# Altium PCB Led_chaser2.PcbDoc
Units mm, origin at the board's own origin, x right, y up, seen from the top; angles counter-clockwise.
Board outline 78.74 x 76.2 mm, 2 copper layers (Top Layer, Bottom Layer), stack 1.1 mm thick; 19 components, 17 nets, 59 pads, 5 vias.
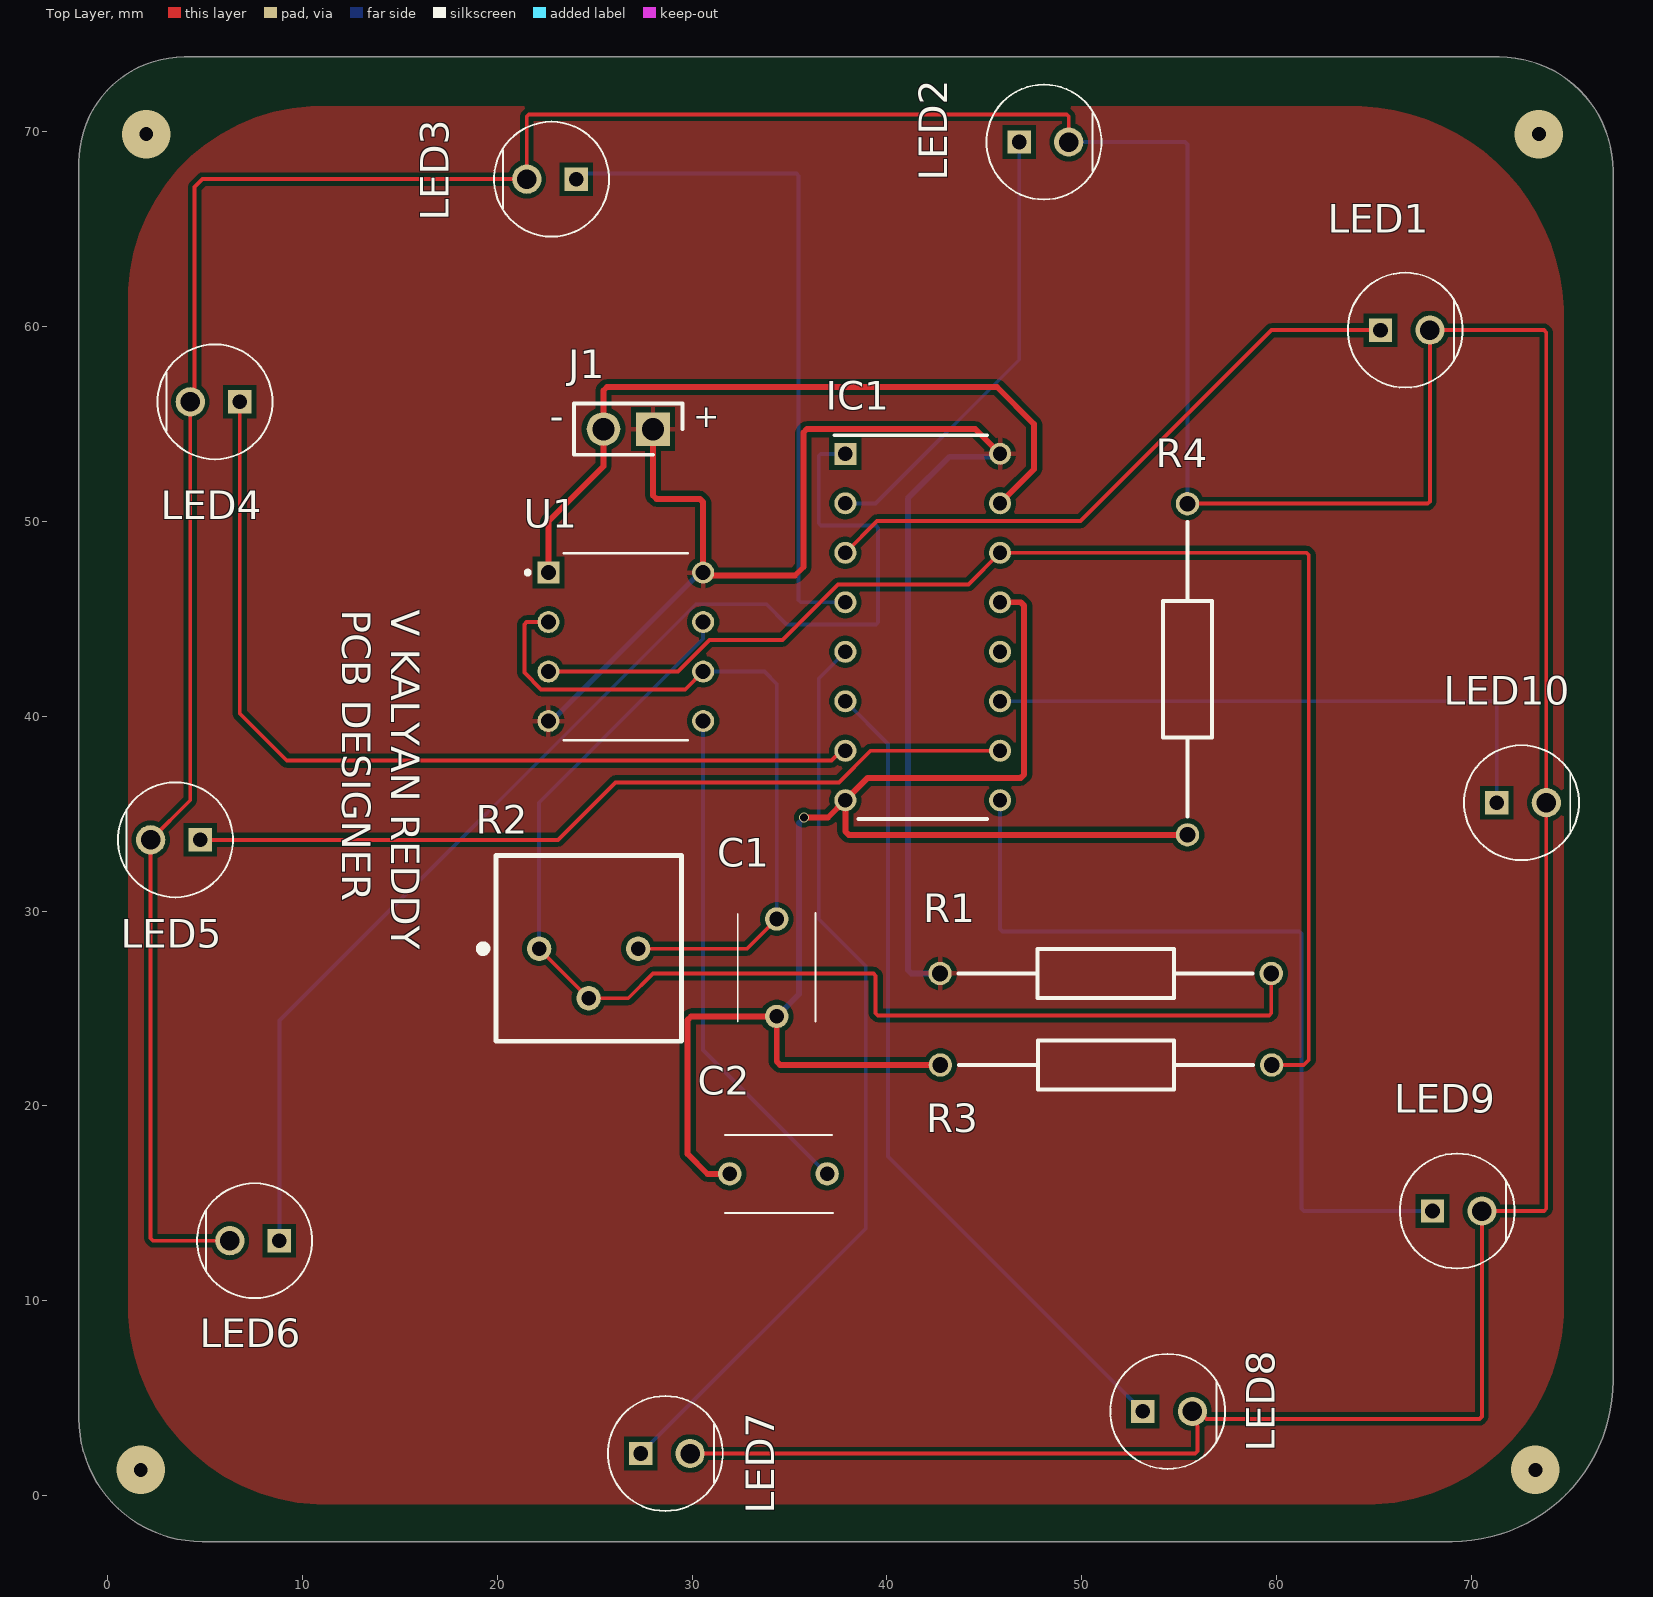
[diagram p0: Top Layer view]
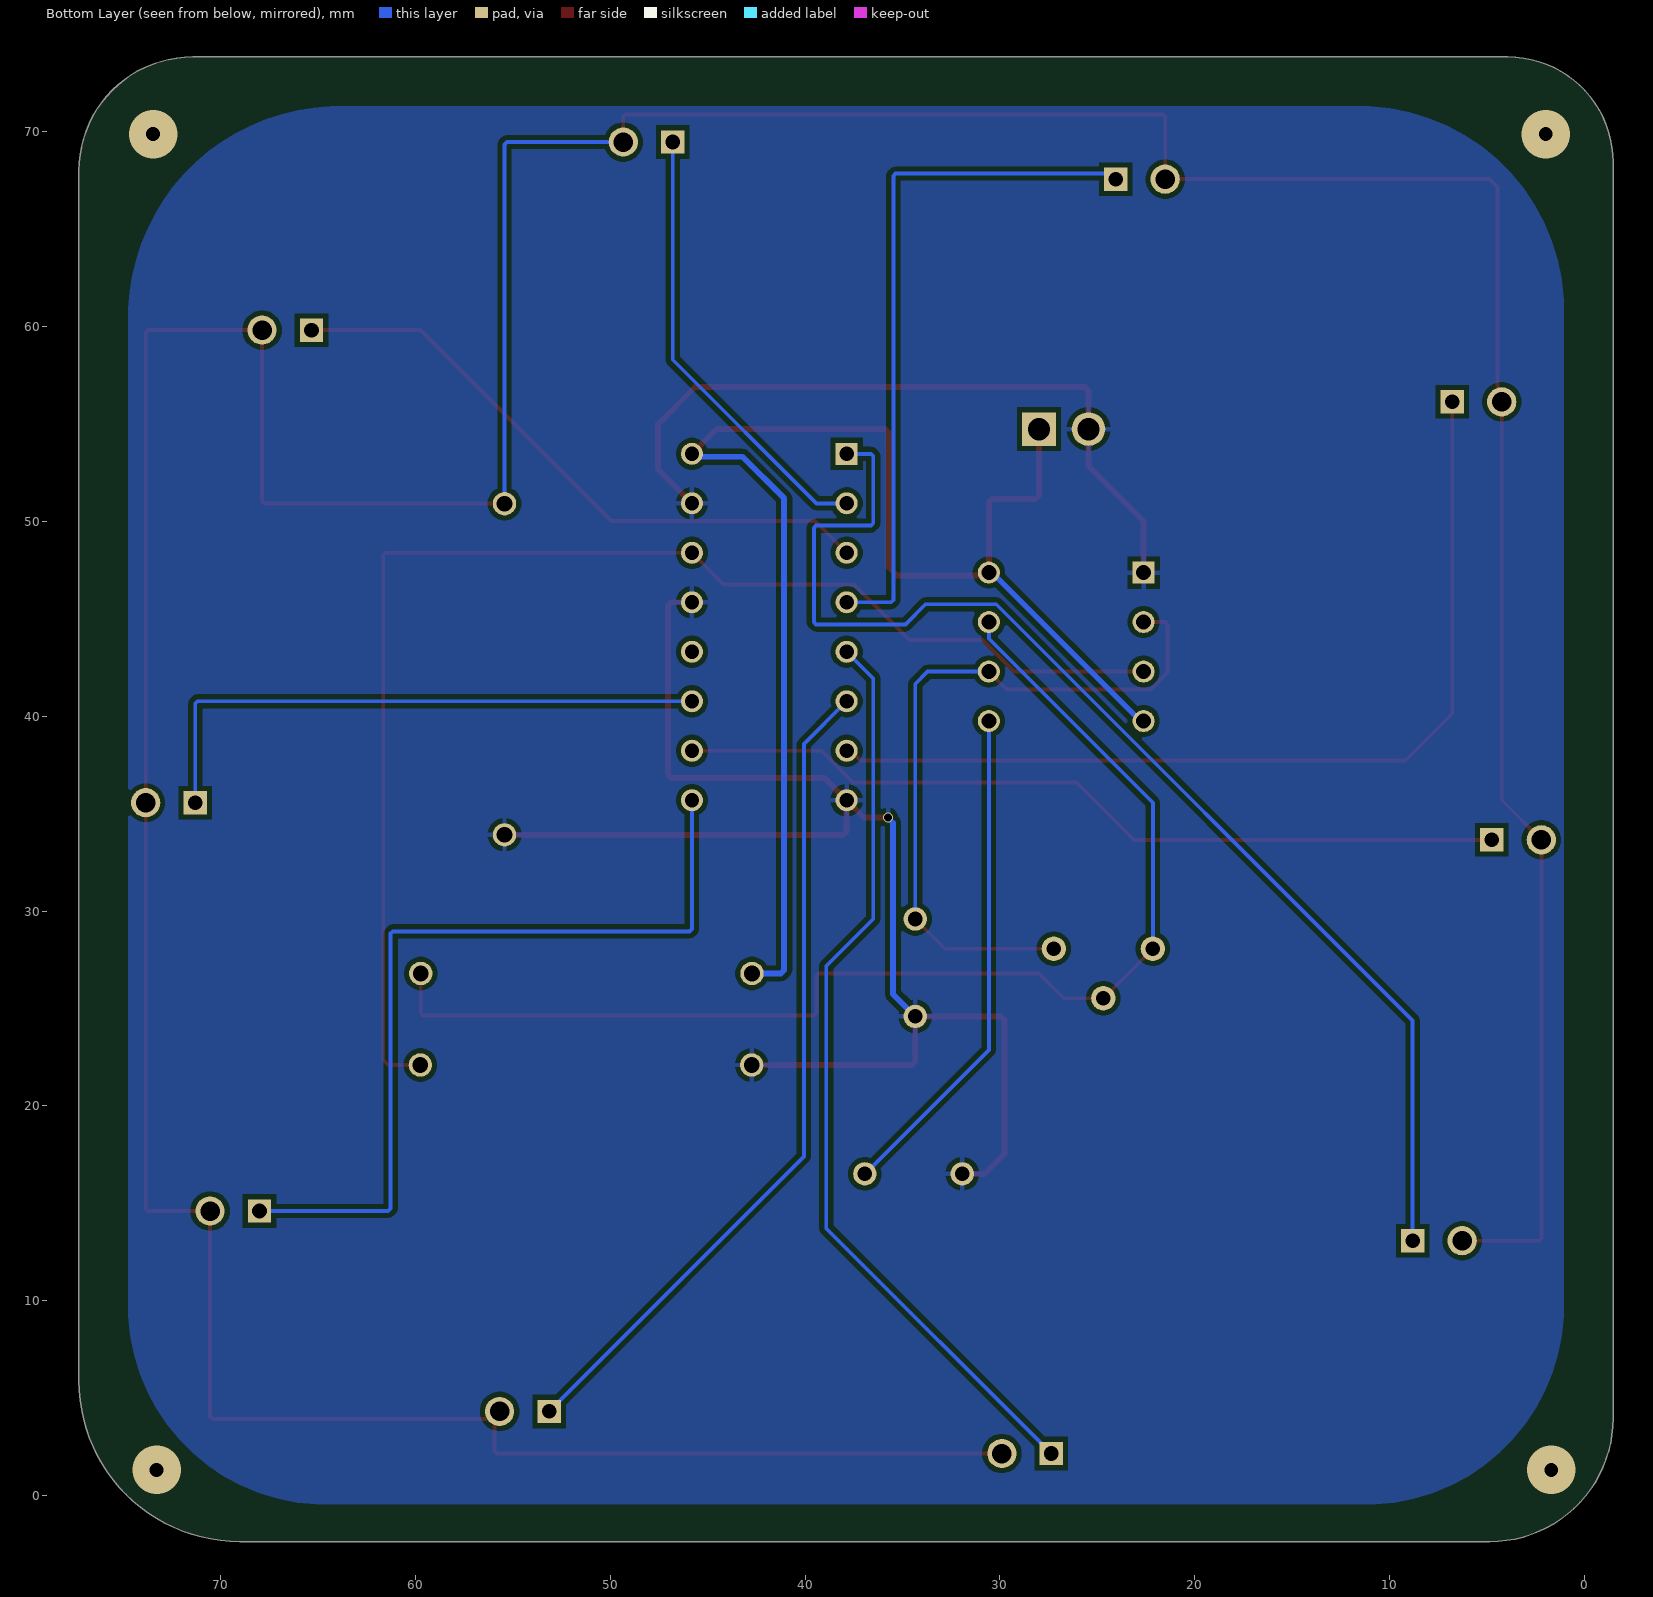
[diagram p1: Bottom Layer view, seen from below]
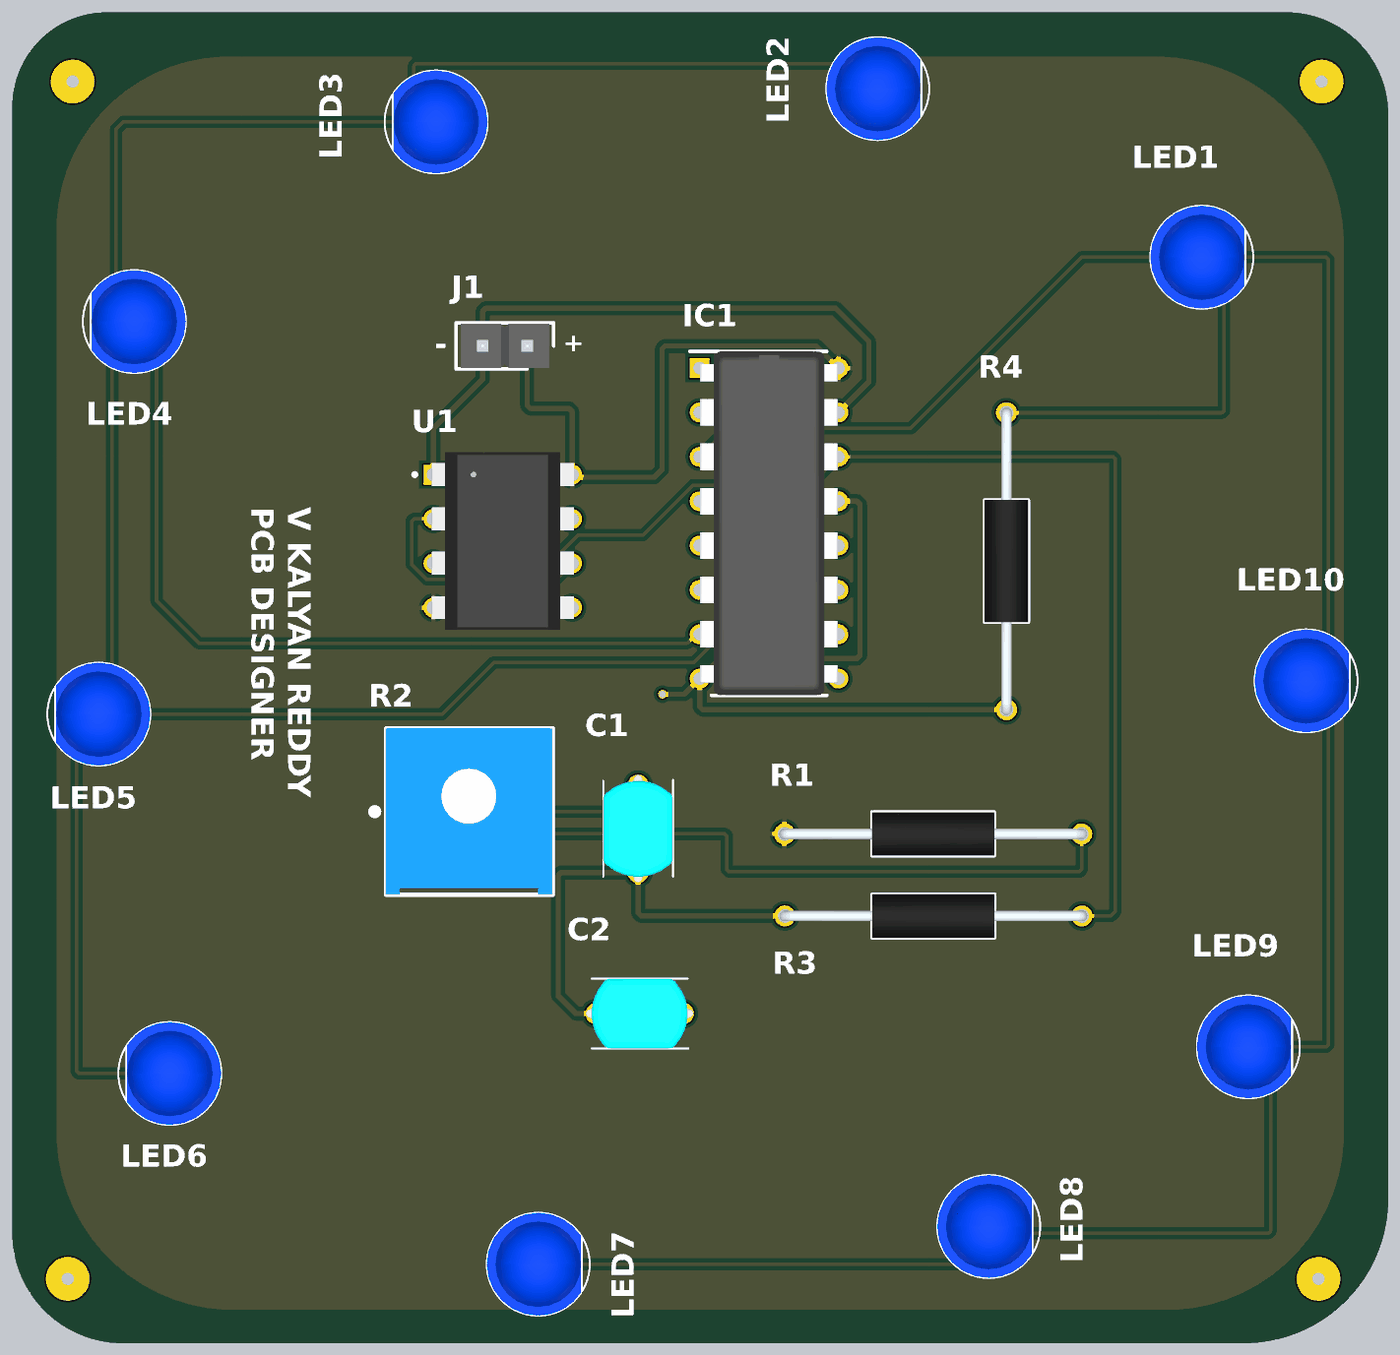
[diagram p2: 3D render of the assembled board from above, using the file's embedded part models]

## Layer stack, top to bottom
Top Solder: solder mask 0.05, SM-001, Dk 4
Top Layer: signal copper 0.1
Dielectric 1: dielectric 0.9, FR-4, Dk 4.8
Bottom Layer: signal copper 0.1
Bottom Solder: solder mask 0.05, SM-001, Dk 4

## Board outline
4.851,-2.362 69.012,-2.362 ccw(c69.012,5.893) 77.267,5.893 77.267,67.996 ccw(c71.425,67.996) 71.425,73.838 3.937,73.838 ccw(c3.937,68.428) -1.473,68.428 -1.473,3.962 ccw(c4.851,3.962)

## Design rules (kind name [scope] priority, off if disabled: settings)
Clearance [All] p1: gap=0.25 ignorepadtopadclearanceinfootprint=FALSE
PolygonConnect [All] p1: connectstyle=Relief reliefconductorwidth=0.254 reliefentries=4 polygonreliefangle="90 Angle" airgapwidth=0.254
RoutingVias [All] p1: holewidth=0.4 width=0.5 viastyle="Through Hole" minholewidth=0.4 minwidth=0.5 maxholewidth=0.4 maxwidth=0.5
SilkToSilkClearance [All] p1: silktosilkclearance=0.25
SilkToSolderMaskClearance [IsPad] p1: minsilkscreentomaskgap=0.25 clearancetoexposedcopper=TRUE
SolderMaskExpansion [All] p1: expansion=0.102 istentingtop=FALSE
Width WidthPow [(InNet('VCC') OR InNet('GND'))] p1: maxlimit=0.3 minlimit=0.2 preferedwidth=0.3
Width [All] p2: maxlimit=0.5 minlimit=0.1 preferedwidth=0.2
28 further rules are at their usual default settings.

## Components (designator, comment, footprint, x,y, rotation, side; value= is the part's Value field where it differs from the comment)
C1 "22uf" RCEC71H226MWK1H03B 34.341,24.591 r90 top
C2 "10nf" RCEC71H226MWK1H03B 31.928,16.51 r0 top
IC1 "CD74HC4017E" DIP794W53P254L1930H508Q16N 41.834,44.577 r0 top (schematic designator IC?)
J1 "M20-9990246" HDRV2W66P0X254_1X2_508X254X874P 27.991,54.737 r180 top
LED1 "151051BS04000" 151051BS04000 65.329,59.817 r0 top
LED2 "151051BS04000" 151051BS04000 46.787,69.469 r0 top
LED3 "151051BS04000" 151051BS04000 24.054,67.564 r180 top
LED4 "151051BS04000" 151051BS04000 6.782,56.134 r180 top
LED5 "151051BS04000" 151051BS04000 4.75,33.655 r180 top
LED6 "151051BS04000" 151051BS04000 8.814,13.081 r180 top
LED7 "151051BS04000" 151051BS04000 27.356,2.159 r0 top
LED8 "151051BS04000" 151051BS04000 53.137,4.318 r0 top
LED9 "151051BS04000" 151051BS04000 67.996,14.605 r0 top
LED10 "151051BS04000" 151051BS04000 71.298,35.56 r0 top
R1 "1M" RESAD1700W60L700D250 59.723,26.797 r180 top
R2 "50k" 3386P_1 29.454,32.847 r180 top
R3 "10k" RESAD1700W60L700D250 42.741,22.098 r0 top
R4 "120 ohm" RESAD1700W60L700D250 55.423,33.909 r90 top
U1 "NE555P" DIP794W45P254L959H508Q8 26.594,43.561 r0 top

## Footprints (in the part's own frame and the unit in brackets; to place one, negate y for a bottom-side part, rotate by r counter-clockwise, add the part's x,y. Pads: shape width x height; smd on the part's side, far side on the other; paste and mask are expansions set on the pad)
3386P_1 [mm]
  round 1.25 hole 0.75: 1(7.305,4.78) 2(4.765,7.32) 3(2.225,4.78)
  silkscreen extent 0,0 10.35,9.53, body extent 0.04,0 9.56,9.53, height 4.76
151051BS04000 [mm]
  rect 1.2x1.2 hole 0.75: 1(0,0)
  round 1.5 hole 1: 2(2.54,0)
  silkscreen extent -1.68,-2.95 4.22,2.95, body extent -1.66,-2.95 3.72,2.95, height 13.22
DIP794W45P254L959H508Q8 [mm]
  rect 1.13x1.13 hole 0.78: 1(-3.97,3.81)
  round 1.13 hole 0.78: 2(-3.97,1.27) 3(-3.97,-1.27) 4(-3.97,-3.81) 5(3.97,-3.81) 6(3.97,-1.27) 7(3.97,1.27) 8(3.97,3.81)
  silkscreen extent -5.13,-4.79 3.17,4.79, body extent -4.06,-5.08 4.06,5.08, height 5.21
DIP794W53P254L1930H508Q16N [mm]
  rect 1.13x1.13 hole 0.73: 1(-3.97,8.89)
  round 1.13 hole 0.73: 2(-3.97,6.35) 3(-3.97,3.81) 4(-3.97,1.27) 5(-3.97,-1.27) 6(-3.97,-3.81) 7(-3.97,-6.35) 8(-3.97,-8.89) 9(3.97,-8.89) 10(3.97,-6.35) 11(3.97,-3.81) 12(3.97,-1.27) 13(3.97,1.27) 14(3.97,3.81) 15(3.97,6.35) 16(3.97,8.89)
  silkscreen extent -4.53,-9.84 3.3,9.84, body extent -3.94,-9.84 3.94,9.84, height 5.09
HDRV2W66P0X254_1X2_508X254X874P [mm]
  rect 1.725x1.725 hole 1.15: 1(0,0)
  round 1.725 hole 1.15: 2(2.54,0)
  silkscreen extent -1.52,-1.32 4.06,1.32, body extent -1.27,-1.27 3.81,1.27, height 8.74
RCEC71H226MWK1H03B [mm]
  round 1.2 hole 0.75: 1(0,0) 2(5,0)
  silkscreen extent -0.25,-2 5.3,2, body extent -0.65,-2 5.65,2, height 9.61
RESAD1700W60L700D250 [mm]
  round 1.2 hole 0.8: 1(0,0) 2(17,0)
  silkscreen extent 0.95,-1.25 16.05,1.25, body extent -0.3,-1.24 17.3,1.24, height 2.5

## Part data
C1 C2: library part RCER71E226MWM1H03A, "Capacitor", Manufacturer_Name="Murata Electronics", Mouser Part Number=81-RCER71E226MWM1H3A, Datasheet Link=https://psearch.en.murata.com/capacitor/product/RCER71E226MWM1H03A.html, Height=10mm, Manufacturer_Part_Number=RCER71E226MWM1H03A, Mouser Price/Stock=https://www.mouser.co.uk/ProductDetail/Murata-Electronics/RCER71E226MWM1H03A/?qs=Zt%252BKPUOg4ofMKWtzCSsNGA%3D%3D
IC1: "Integrated Circuit", Manufacturer_Name="Texas Instruments", Mouser Part Number=595-CD74HC4017E, Arrow Part Number=CD74HC4017E, Arrow Price/Stock=https://www.arrow.com/en/products/cd74hc4017e/texas-instruments?region=nac, Datasheet Link=http://www.ti.com/lit/gpn/cd74hc4017, Height=5.08mm, Manufacturer_Part_Number=CD74HC4017E, Mouser Price/Stock=https://www.mouser.co.uk/ProductDetail/Texas-Instruments/CD74HC4017E?qs=spW5eSrOWB5vviXLi8qByQ%3D%3D
J1: "Connector", Manufacturer_Name=Harwin, Mouser Part Number=855-M20-9990246, Datasheet Link=https://cdn.harwin.com/pdfs/M20-999.pdf, Height=8.74mm, Manufacturer_Part_Number=M20-9990246, Mouser Price/Stock=https://www.mouser.co.uk/ProductDetail/Harwin/M20-9990246?qs=Jph8NoUxIfWjw4WmyRvzag%3D%3D
LED1 LED2 LED3 LED4 LED5 LED6 LED7 LED8 LED9 LED10: "LED", Manufacturer_Name="Wurth Elektronik", Mouser Part Number=710-151051BS04000, Datasheet Link=https://katalog.we-online.de/led/datasheet/151051BS04000.pdf, Height=8.95mm, Manufacturer_Part_Number=151051BS04000, Mouser Price/Stock=https://www.mouser.co.uk/ProductDetail/Wurth-Elektronik/151051BS04000?qs=LlUlMxKIyB3OjuZOlqaOjg%3D%3D
R1 R3 R4: library part OD103JE, "Resistor", Manufacturer_Name=Ohmite, Mouser Part Number=588-OD103JE, Datasheet Link=https://componentsearchengine.com/Datasheets/2/OD103JE.pdf, Manufacturer_Part_Number=OD103JE, Mouser Price/Stock=https://www.mouser.co.uk/ProductDetail/Ohmite/OD103JE?qs=FhgLWrJuMt%252B%2F7VciYatGIg%3D%3D
R2: library part 3386P-1-104LF, "Variable Resistor", Manufacturer_Name=Bourns, Mouser Part Number=652-3386P-1-104LF, Arrow Part Number=3386P-1-104LF, Arrow Price/Stock=https://www.arrow.com/en/products/3386p-1-104lf/bourns?region=nac, Datasheet Link=https://componentsearchengine.com/Datasheets/2/3386P-1-104LF.pdf, Manufacturer_Part_Number=3386P-1-104LF, Mouser Price/Stock=https://www.mouser.co.uk/ProductDetail/Bourns/3386P-1-104LF?qs=m2uG%2FFdTAPVt57WUqvIChw%3D%3D
U1: Package=None, Availability=Unavailable, MP=NE555P, Price=None

## Via types
v1: diameter 2.5, hole 0.711, Top Layer to Bottom Layer, 4 vias
v2: diameter 0.5, hole 0.4, Top Layer to Bottom Layer, 1 vias

## Nets (pads, with @x,y where several pads share a name; then routed paths per layer and width w, separated by ;. In a path a pad name is that pad's centre, name@x,y a point inside that pad or via, vN(x,y) a via of type N, cw(c..) or ccw(c..) an arc to the next point about the centre after c; other vN are vias at no path point)
GND: C1.1 C2.1 IC1.8 IC1.13 IC1.15 J1.2 R3.1 R4.1 U1.1 | length 115.4
  Top Layer w0.3: U1.1 22.624,50.005 25.451,52.832 J1.2 25.451,56.72 25.627,56.896 45.644,56.896 47.549,54.991 47.549,52.672 IC1.15 ; C2.1 30.785,16.51 29.769,17.526 29.769,24.415 29.945,24.591 C1.1 34.341,22.274 34.517,22.098 R3.1 ; v2(35.738,34.798) 36.975,34.798 IC1.8 ; IC1.13 46.865,45.847 47.041,45.671 47.041,37.012 46.865,36.837 39.013,36.837 IC1.8 ; R4.1 38.04,33.909 37.864,34.085 IC1.8
  Bottom Layer w0.3: C1.1 35.484,25.734 35.484,34.522 35.738,34.776 v2(35.738,34.798)
NetC1_2: C1.2 R2.3 U1.2 U1.6 | length 37.5
  Top Layer w0.2: U1.2 21.504,44.831 21.387,44.714 21.387,42.234 22.245,41.376 29.649,41.376 U1.6 ; R2.3 32.817,28.067 C1.2
  Bottom Layer w0.2: U1.6 33.706,42.291 34.341,41.656 C1.2
NetC2_2: C2.2 U1.5 | length 25.9
  Bottom Layer w0.2: U1.5 30.564,22.874 C2.2
NetIC1_1: IC1.1 LED6.1 | length 64.2
  Bottom Layer w0.2: LED6.1 8.814,24.375 30.185,45.746 33.807,45.746 34.849,44.704 39.431,44.704 39.548,44.821 39.548,49.667 39.431,49.784 36.617,49.784 36.5,49.901 36.5,53.35 36.617,53.467 IC1.1
NetIC1_2: IC1.2 LED2.1 | length 23.2
  Bottom Layer w0.2: IC1.2 39.421,50.927 46.787,58.293 LED2.1
NetIC1_3: IC1.3 LED1.1 | length 32.2
  Top Layer w0.2: IC1.3 39.489,50.012 49.936,50.012 59.741,59.817 LED1.1
NetIC1_4: IC1.4 LED3.1 | length 35.8
  Bottom Layer w0.2: LED3.1 24.342,67.853 35.35,67.853 35.467,67.735 35.467,45.964 35.584,45.847 IC1.4
NetIC1_5: IC1.5 LED7.1 | length 47.5
  Bottom Layer w0.2: LED7.1 38.913,13.716 38.913,27.179 36.499,29.593 36.499,41.942 IC1.5
NetIC1_6: IC1.6 LED8.1 | length 42.8
  Bottom Layer w0.2: IC1.6 40.056,38.575 40.056,17.399 LED8.1
NetIC1_7: IC1.7 LED4.1 | length 48.3
  Top Layer w0.2: LED4.1 6.782,40.132 9.195,37.719 37.149,37.719 37.657,38.227 IC1.7
NetIC1_9: IC1.9 LED9.1 | length 43.1
  Bottom Layer w0.2: IC1.9 45.804,29.073 45.921,28.956 61.148,28.956 61.265,28.839 61.265,14.732 61.392,14.605 LED9.1
NetIC1_10: IC1.10 LED5.1 | length 42.9
  Top Layer w0.2: LED5.1 23.115,33.655 26.062,36.602 37.533,36.602 39.158,38.227 IC1.10
NetIC1_11: IC1.11 LED10.1 | length 30.6
  Bottom Layer w0.2: IC1.11 71.181,40.767 71.298,40.65 LED10.1
NetIC1_14: IC1.14 R3.2 U1.3 | length 69.5
  Top Layer w0.2: U1.3 29.27,42.291 30.895,43.916 34.639,43.916 37.485,46.762 44.179,46.762 IC1.14 61.529,48.387 61.646,48.27 61.646,22.352 61.392,22.098 R3.2
NetLED1_2: LED1.2 LED2.2 LED3.2 LED4.2 LED5.2 LED6.2 LED7.2 LED8.2 LED9.2 LED10.2 R4.2 | length 262.4
  Top Layer w0.2: LED6.2 2.337,13.081 2.21,13.208 LED5.2 4.242,35.687 LED4.2 4.467,56.359 4.467,67.154 4.877,67.564 LED3.2 21.514,70.774 21.631,70.891 49.21,70.891 49.327,70.774 LED2.2 ; LED7.2 55.823,2.159 55.94,2.276 55.94,3.551 55.926,3.566 LED8.2@55.926,4.069 ; R4.2 67.752,50.909 67.869,51.026 LED1.2 73.711,59.817 73.838,59.69 73.838,14.722 73.721,14.605 LED9.2 70.536,4.057 70.419,3.94 56.407,3.94 56.277,4.069 LED8.2@55.926,4.069 ; LED8.2 LED8.2@55.926,4.069
  Bottom Layer w0.2: LED2.2 55.306,69.469 55.423,69.352 R4.2
NetR1_1: R1.1 R2.1 R2.2 U1.7 | length 63.5
  Top Layer w0.2: R2.1 R2.2 26.721,25.527 27.991,26.797 39.304,26.797 39.421,26.68 39.421,24.755 39.538,24.638 59.606,24.638 59.723,24.755 R1.1
  Bottom Layer w0.2: R2.1 22.149,35.56 30.564,43.975 U1.7
VCC: IC1.16 J1.1 R1.2 U1.4 U1.8 | length 75.6
  Top Layer w0.3: U1.4 U1.4@22.784,39.751 ; J1.1 27.991,51.332 28.167,51.156 30.388,51.156 30.564,50.981 U1.8 30.716,47.219 35.277,47.219 35.712,47.654 35.712,54.561 35.888,54.737 44.534,54.737 IC1.16
  Bottom Layer w0.3: U1.4 22.784,39.751 30.404,47.371 U1.8 ; R1.2 41.248,26.797 41.072,26.973 41.072,51.181 43.211,53.32 45.657,53.32 IC1.16
pads on no net: IC1.12
copper on no net:
  other v1: 1.702,1.321 73.279,1.321 1.981,69.875 73.457,69.875

## Polygon pours and split planes (outlines as drawn)
GND on Bottom Layer "NONET_L-01_P-001" (solid, remove dead copper, pour order 5): 11.227,-0.457 64.567,-0.457 ccw(c64.567,9.703) 74.727,9.703 74.727,60.503 ccw(c63.932,60.503) 63.932,71.298 11.506,71.298 ccw(c11.506,60.859) 1.067,60.858 1.067,9.703 ccw(c11.227,9.703)
VCC on Top Layer "NONET_L-01_P-001" (solid, remove dead copper, pour order 4): 11.227,-0.457 64.567,-0.457 ccw(c64.567,9.703) 74.727,9.703 74.727,60.503 ccw(c63.932,60.503) 63.932,71.298 10.922,71.298 ccw(c10.922,61.443) 1.067,61.443 1.067,9.703 ccw(c11.227,9.703)

## Silkscreen, mask and mechanical layers (free items; w line width, h text height)
Top Overlay:
  text "+" at 30.048,54.419 h2.03
  text "-" at 22.682,54.237 h2.5
  text "V KALYAN REDDY / PCB DESIGNER" at 11.557,45.466 h2.5 r270